# Altium PCB PCBrecepteurs.PcbDoc
Units mil, origin at the board's own origin, x right, y up, seen from the top; angles counter-clockwise.
Board outline 2635 x 2115 mil, 4 copper layers (Top Layer, Internal Plane 1, Internal Plane 2, Bottom Layer); 34 components, 27 nets, 106 pads, 0 vias.
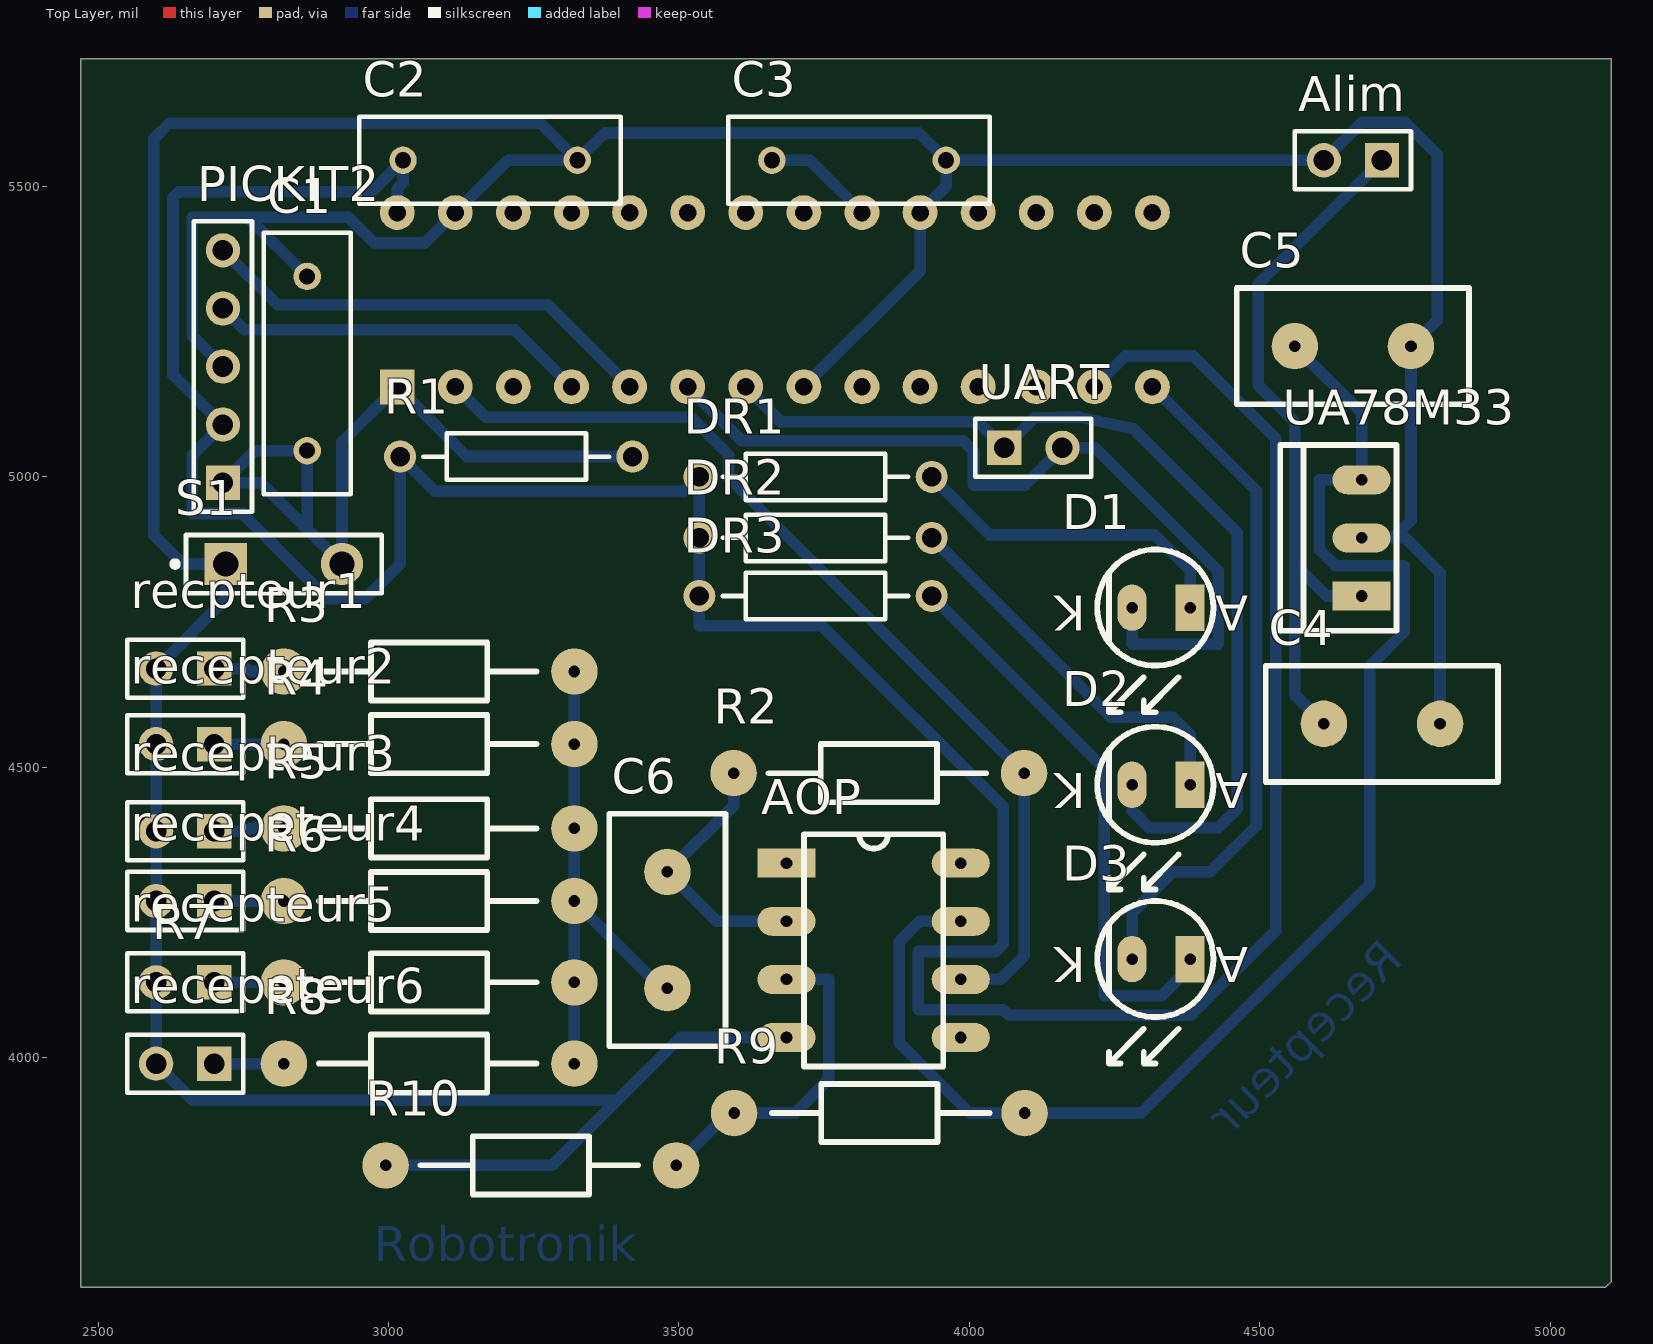
[diagram p0: Top Layer view]
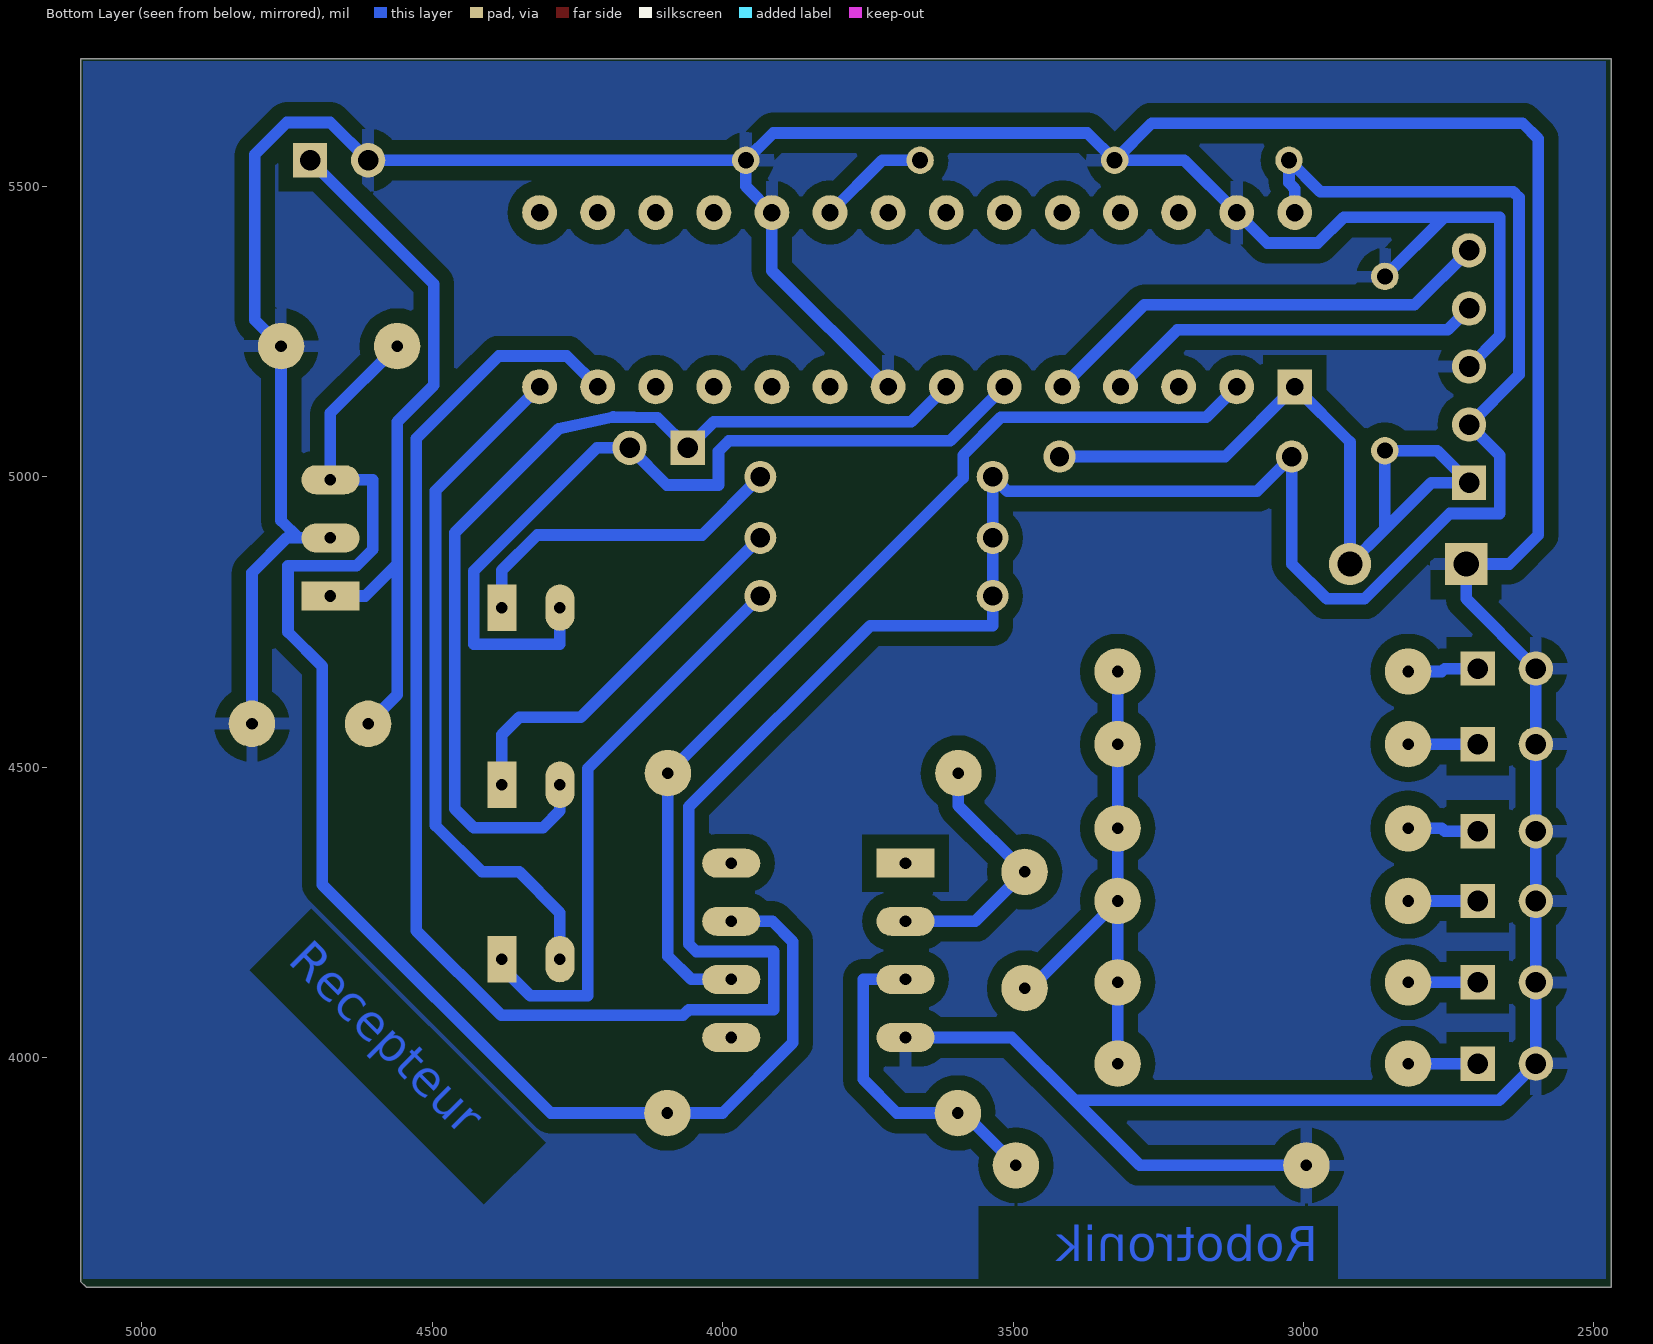
[diagram p1: Bottom Layer view, seen from below]
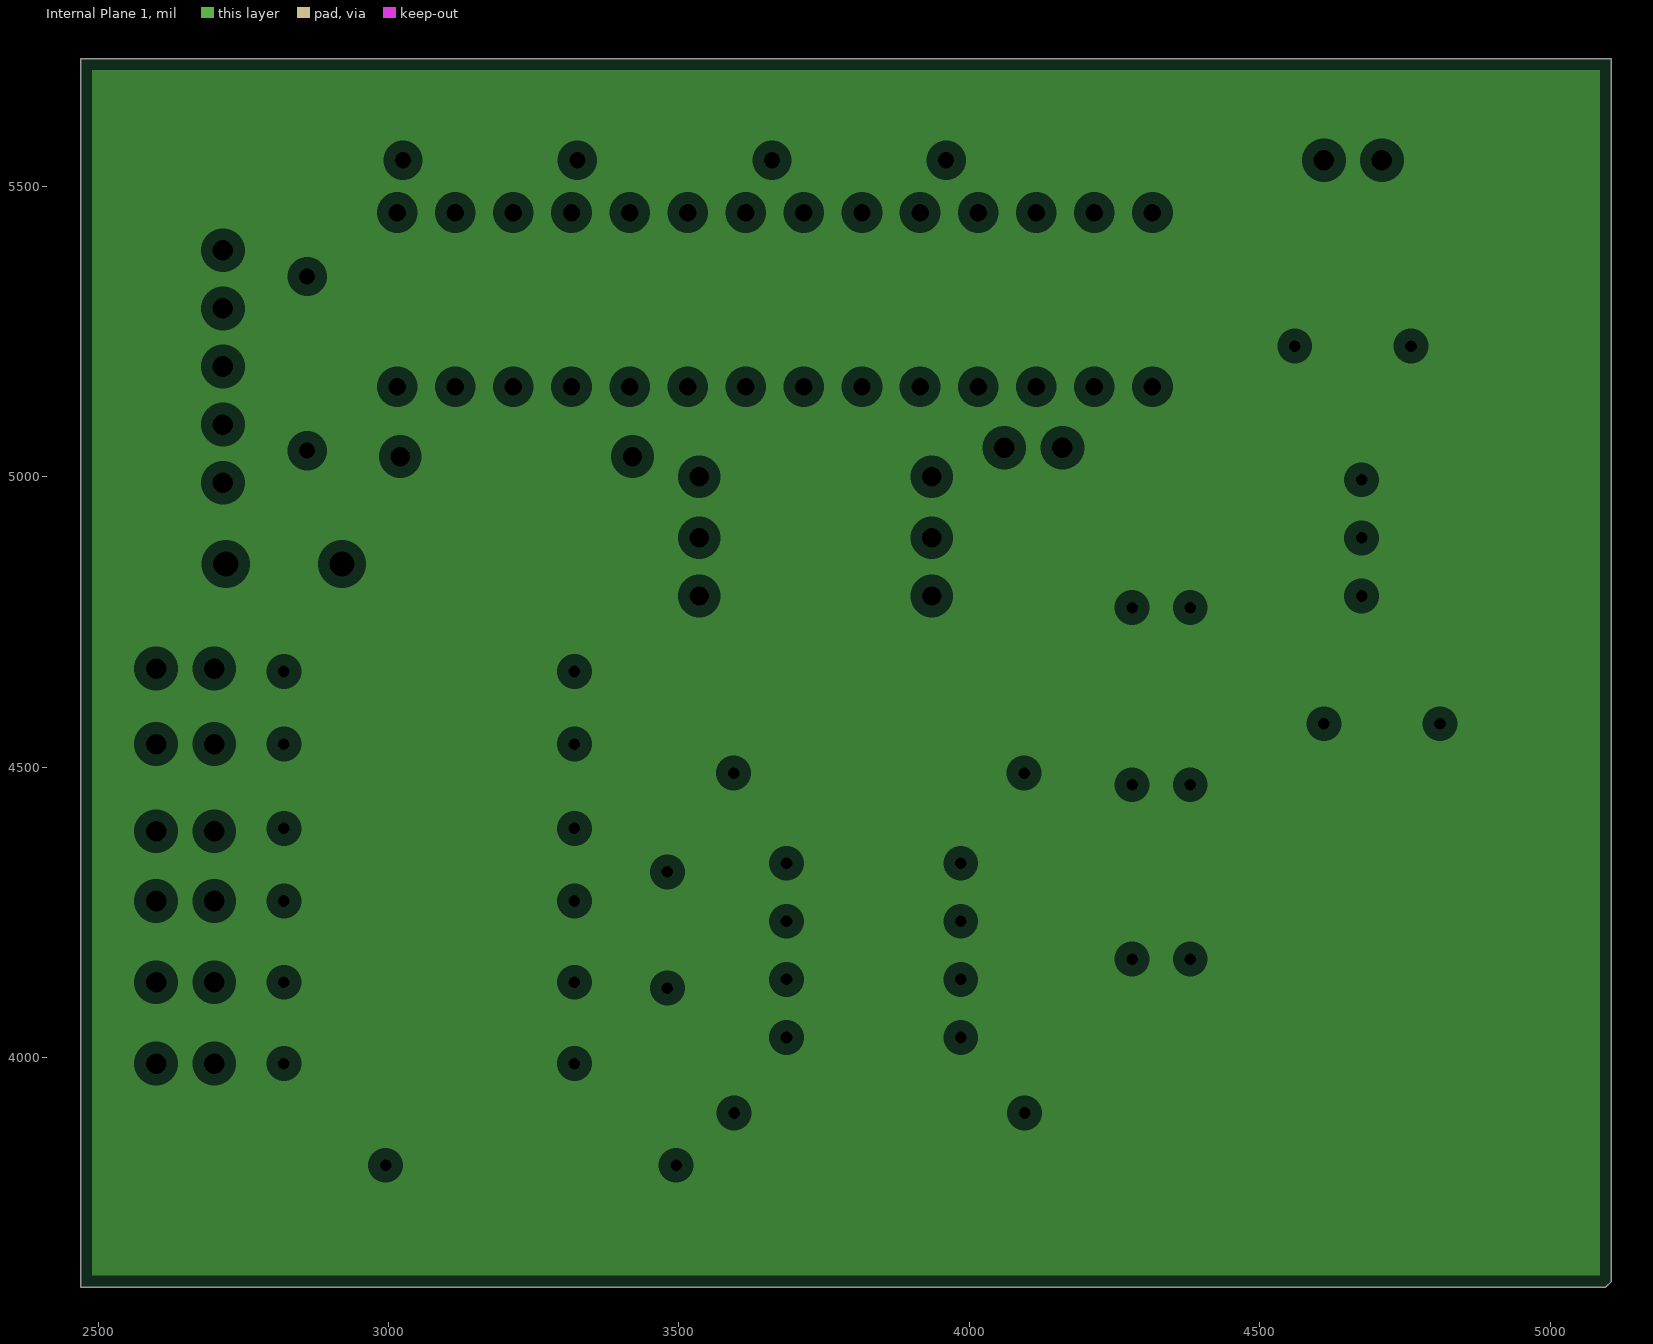
[diagram p2: Internal Plane 1, clearances drawn from the general rule]
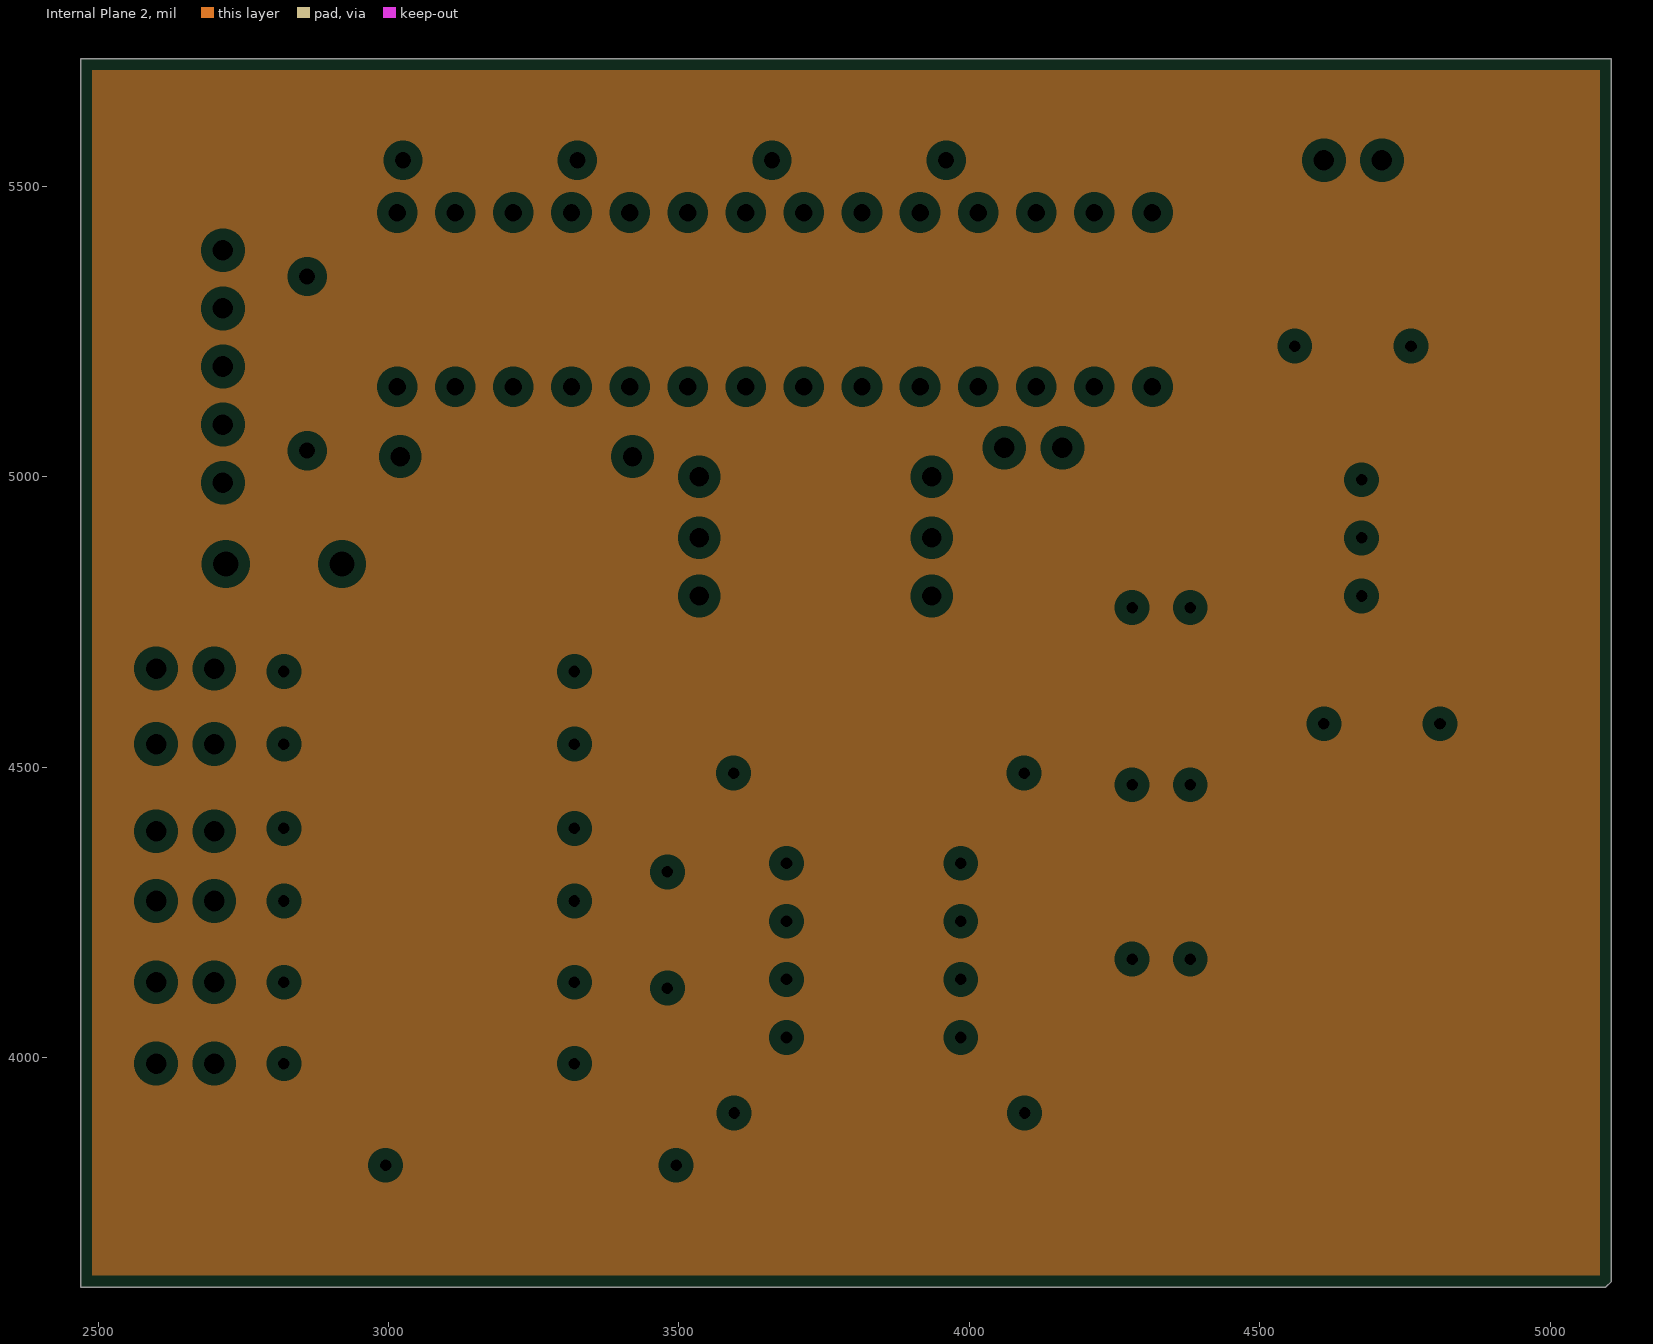
[diagram p3: Internal Plane 2, clearances drawn from the general rule]

## Layer stack, top to bottom
Top Layer: signal copper 1.4
Dielectric: dielectric 12.6, FR-4, Dk 4.8
Internal Plane 1: plane copper 1.4
Dielectric: dielectric 12.6, FR-4, Dk 4.8
Internal Plane 2: plane copper 1.4
Dielectric: dielectric 12.6, FR-4, Dk 4.8
Bottom Layer: signal copper 1.4

## Board outline
2470,5720 5105,5720 5105,3615 5095,3605 2470,3605

## Design rules (kind name [scope] priority, off if disabled: settings)
Clearance [All] p1: gap=13
FabricationTestPointUsage TestPointUsage [All] p1: valid=0 allowmultiple=FALSE
FabricationTestpoint Testpoint [All] p1: side=3 testpointundercomponent=TRUE minsize=40 maxsize=100 preferedsize=60 minholesize=0 maxholesize=40 preferedholesize=32 testpointgrid=1 allowsidetop=TRUE allowsidebottom=TRUE usegrid=TRUE gridtolerance=0.01
PlaneClearance [All] p1: clearance=20
PlaneConnect [All] p1: planeconnectstyle=Relief reliefexpansion=20 reliefentries=4 reliefconductorwidth=10 reliefairgap=10
PolygonConnect [All] p1: connectstyle=Relief reliefconductorwidth=20 reliefentries=4 polygonreliefangle="90 Angle"
RoutingLayers RoutingLayers_1 [All] p1: top layer_v5=FALSE bottom layer_v5=TRUE
RoutingVias [All] p1: holewidth=20 width=60 viastyle="Through Hole" minholewidth=20 minwidth=60 maxholewidth=20 maxwidth=60
SilkscreenOverComponentPads [All] p1: minsilkscreentomaskgap=10
SolderMaskExpansion [All] p1: expansion=4
Width Width_1 [All] p1: maxlimit=20 minlimit=20 preferedwidth=20
22 further rules are at their usual default settings.

## Components (designator, comment, footprint, x,y, rotation, side; value= is the part's Value field where it differs from the comment)
Alim "Header 2" HDR1X2 4710,5545 r180 top
AOP "TL081CN" DIP8 3685,4335 r0 top
C1 "Cap" RAD-0.3 2860,5195 r270 top
C2 "Cap" RAD-0.3 3175,5545 r180 top
C3 "Cap" RAD-0.3 3810,5545 r180 top
C4 "Cap2" CAPA2 4810,4575 r180 top
C5 "Cap2" CAPA2 4760,5225 r180 top
C6 "Cap2" CAPA2 3480,4120 r90 top
D1 "Led Verte" LED 4380,4775 r180 top
D2 "Led Orange" LED 4380,4470 r180 top
D3 "Led Rouge" LED 4380,4170 r180 top
DR1 "Res2" AXIAL-0.4 3735,5000 r180 top
DR2 "Res2" AXIAL-0.4 3735,4895 r180 top
DR3 "Res2" AXIAL-0.4 3735,4795 r180 top
PICKIT2 "Header 5H" HDR1X5 2715,4990 r90 top
R1 "Res2" AXIAL-0.4 3220,5035 r180 top
R2 "Res2" res5_1/4W 3594,4490 r0 top
R3 "Res2" res5_1/4W 2820,4665 r0 top
R4 "Res2" res5_1/4W 2820,4540 r0 top
R5 "Res2" res5_1/4W 2820,4395 r0 top
R6 "Res2" res5_1/4W 2820,4270 r0 top
R7 "Res2" res5_1/4W 2820,4130 r0 top
R8 "Res2" res5_1/4W 2820,3990 r0 top
R9 "Res2" res5_1/4W 4095,3905 r180 top
R10 "Res2" res5_1/4W 2995,3815 r0 top
recepeteur4 "Header 2" HDR1X2 2700,4270 r180 top
recepeteur6 "Header 2" HDR1X2 2700,3990 r180 top
recepteur2 "Header 2" HDR1X2 2700,4540 r180 top
recepteur3 "Header 2" HDR1X2 2700,4390 r180 top
recepteur5 "Header 2" HDR1X2 2700,4130 r180 top
recpteur1 "Header 2" HDR1X2 2700,4670 r180 top
S1 "SW-SPST" SPST-2 2820,4850 r0 top
UA78M33 "LM7805CT" TO220 4675,4795 r90 top
UART "Header 2" HDR1X2 4060,5050 r0 top

## Footprints (in the part's own frame and the unit in brackets; to place one, negate y for a bottom-side part, rotate by r counter-clockwise, add the part's x,y. Pads: shape width x height; smd on the part's side, far side on the other; paste and mask are expansions set on the pad)
AXIAL-0.4 [mm] "Axial Device, Thru-Hole; 2 Leads; 0.4 in Pin Spacing"
  round 1.4 hole 0.85: 1(-5.08,0) 2(5.08,0)
  silkscreen extent -4.06,-1.02 4.06,1.02
CAPA2 [mil]
  round 80 hole 20: 1(0,0) 2(200,0)
  silkscreen extent -100,-100 300,100
DIP8 [mil]
  rect 100x50 hole 20: 1(0,0)
  oval 100x50 hole 20: 2(0,-100) 3(0,-200) 4(0,-300) 5(300,-300) 6(300,-200) 7(300,-100) 8(300,0)
  silkscreen extent 30,-350 270,50
HDR1X2 [mm] "Connector; Header; 2 Position"
  rect 1.5x1.5 hole 0.9: 1(0,0)
  round 1.5 hole 0.9: 2(2.54,0)
  silkscreen extent -1.27,-1.27 3.81,1.27
HDR1X5 [mm] "Connector; Header; 5 Position"
  rect 1.5x1.5 hole 0.9: 1(0,0)
  round 1.5 hole 0.9: 2(2.54,0) 3(5.08,0) 4(7.62,0) 5(10.16,0)
  silkscreen extent -1.27,-1.27 11.43,1.27
LED [mil]
  rect 50x80 hole 20: 1(0,0)
  oval 50x80 hole 20: 2(100,0)
  silkscreen extent -40,-100 160,180
RAD-0.3 [mm] "Radial Cap, Thru-Hole; 2 Leads; 0.3 in Pin Spacing"
  round 1.2 hole 0.7: 1(-3.81,0) 2(3.81,0)
  silkscreen extent -5.71,-1.91 5.71,1.91
res5_1/4W [mil]
  round 80 hole 20: 1(0,0) 2(500,0)
  silkscreen extent 60,-50 435,50
SPST-2 [mm] "Switch; 2 Leads"
  rect 1.85x1.85 hole 1.1: 1(-2.54,0)
  round 1.85 hole 1.1: 2(2.54,0)
  silkscreen extent -4.89,-1.27 4.28,1.27
TO220 [mil]
  rect 50x100 hole 20: 1(0,0)
  oval 50x100 hole 20: 2(100,0) 3(200,0)
  silkscreen extent -60,-60 260,140

## Part data
Alim recepeteur4 recepeteur6 recepteur2 recepteur3 recepteur5 recpteur1 UART: "Header, 2-Pin"
AOP: "General-Purpose J-FET Single Operational Amplifier"
C1 C2 C3 C4 C5 C6: "Capacitor"
D1 D2 D3: library part Led, "LED"
DR1 DR2 DR3 R1 R2 R3 R4 R5 R6 R7 R8 R9 R10: "Resistor"
PICKIT2: "Header, 5-Pin, Right Angle"
S1: "Single-Pole, Single-Throw Switch"
UA78M33: "Series 3-Terminal Positive Regulator"

## Free pads (board coordinates)
  round 60 hole 30: 0(3015,5455) 1(3115,5455) 2(3215,5455) 3(3315,5455) 4(3415,5455) 5(3515,5455) 6(3615,5455) 7(3715,5455) 8(3815,5455) 9(3915,5455) 10(4015,5455) 11(4115,5455) 12(4215,5455) 13(4315,5455) 14(4315,5155) 15(4215,5155) 16(4115,5155) 17(4015,5155) 18(3915,5155) 19(3815,5155) 20(3715,5155) 21(3615,5155) 22(3515,5155) 23(3415,5155) 24(3315,5155) 25(3215,5155) 26(3115,5155)
  rect 60x60 hole 30: 27(3015,5155)

## Nets (pads, with @x,y where several pads share a name; then routed paths per layer and width w, separated by ;. In a path a pad name is that pad's centre, name@x,y a point inside that pad or via, vN(x,y) a via of type N, cw(c..) or ccw(c..) an arc to the next point about the centre after c; other vN are vias at no path point)
ALIM: Alim.1 C4.2 UA78M33.1 | length 1242.8
  Bottom Layer w20: C4.2 4560,4625 4560,4850 ; UA78M33.1 4615,4795 4560,4850 ; Alim.1 4497,5332 4497,5158.01 4560,5095.01 4560,4850
DEBUG: D3.2 pad.14 | length 1185.3
  Bottom Layer w20: D3.2 4280,4250 4350,4320 4414,4320 4494,4400 4494,4976 pad.14
GND: Alim.2 AOP.4 C1.1 C2.1 C3.1 C4.1 C5.1 pad.1 pad.9 pad.20 PICKIT2.3 R10.1 recepeteur4.2 recepeteur6.2 recepteur2.2 recepteur3.2 recepteur5.2 recpteur1.2 S1.1 UA78M33.2 | length 8439.1
  Bottom Layer w20: PICKIT2.3 2662,5243 2662,5447 2758,5447 ; C1.1 2758,5447 ; R10.1 3282,3815 3394,3927 ; AOP.4 3502,4035 3394,3927 ; pad.20 3915,5355 pad.9 3960,5500 C3.1 ; UA78M33.2 4730,4895 ; C4.1 4810,4835 4750,4895 4730,4895 ; 2758,5447 2930.94,5447 2975.47,5402.47 3062.47,5402.47 pad.1 3205,5545 C2.1 ; C2.1 3372,5592 3913,5592 C3.1 ; C2.1 3261,5609 2623,5609 2596,5582 2596,4900 2646,4850 S1.1 2720,4790 recpteur1.2 recepteur2.2 recepteur3.2 recepeteur4.2 recepteur5.2 recepeteur6.2 2663,3927 3394,3927 ; C3.1 Alim.2 4675,5610 4750,5610 4805,5555 4805,5270 C5.1 4760,4925 4730,4895
NetAOP_2: AOP.2 C6.2 R2.1 | length 457.4
  Bottom Layer w20: R2.1 3594,4434 C6.2 3565,4235 AOP.2
NetAOP_3: AOP.3 R9.2 R10.2 | length 569.3
  Bottom Layer w20: R10.2 3585,3905 R9.2 3700,3905 3758,3963 3758,4135 AOP.3
NetC1_2: C1.2 pad.27 PICKIT2.1 R1.1 S1.2 | length 1364.8
  Bottom Layer w20: R1.1 3135,5035 pad.27 2920,5060 S1.2 2860,4910 ; 2860,4910 2780,4990 PICKIT2.1 2770,5045 C1.2 2860,4910
NetC3_2: C3.2 pad.8 | length 192.3
  Bottom Layer w20: C3.2 3725,5545 pad.8
NetC6_1: C6.1 R3.2 R4.2 R5.2 R6.2 R7.2 R8.2 | length 897.1
  Bottom Layer w20: R8.2 R7.2 R6.2 ; R3.2 R4.2 R5.2 R6.2 ; C6.1 3470,4120 R6.2
NetD1_1: D1.1 DR1.1 | length 575.7
  Bottom Layer w20: DR1.1 4035,4900 4319,4900 4380,4839 D1.1
NetD2_1: D2.1 DR2.1 | length 671.4
  Bottom Layer w20: DR2.1 4244,4586 4350,4586 4380,4556 D2.1
NetD3_1: D3.1 DR3.1 | length 993.4
  Bottom Layer w20: DR3.1 4232,4498 4232,4107 4331.21,4107 4380,4155.79 D3.1
PGC: pad.23 PICKIT2.5 | length 797.3
  Bottom Layer w20: PICKIT2.5 2809,5296 3274,5296 pad.23
PGD: pad.24 PICKIT2.4 | length 655.9
  Bottom Layer w20: PICKIT2.4 2752,5253 3217,5253 pad.24
R1: R3.1 recpteur1.1 | length 122.1
  Bottom Layer w20: recpteur1.1 2757,4670 2762,4665 R3.1
R2: R4.1 recepteur2.1 | length 120
  Bottom Layer w20: recepteur2.1 R4.1
R3: R5.1 recepteur3.1 | length 122.1
  Bottom Layer w20: recepteur3.1 2757,4390 2762,4395 R5.1
R4: R6.1 recepeteur4.1 | length 120
  Bottom Layer w20: recepeteur4.1 R6.1
R5: R7.1 recepteur5.1 | length 120
  Bottom Layer w20: recepteur5.1 R7.1
R6: R8.1 recepeteur6.1 | length 120
  Bottom Layer w20: recepeteur6.1 R8.1
SORTIECAPTEURS: AOP.6 pad.26 R2.2 | length 1718.1
  Bottom Layer w20: pad.26 3167.53,5102.47 3520.86,5102.47 3586,5037.33 3586,4998 R2.2 4094,4175 4054,4135 AOP.6
TOUR1: pad.5
TOUR2: pad.4
TOUR3: pad.3
UART_RX: D2.2 pad.21 UART.1 | length 1714
  Bottom Layer w20: pad.21 3675,5095 4015,5095 UART.1 4112,5102 4188,5103 4282,5083 4461,4904 4461,4429 4428,4396 4309,4396 4280,4425 D2.2
UART_TX: D1.2 pad.22 UART.2 | length 1468.3
  Bottom Layer w20: pad.22 3608,5062 3989,5062 4007,5044 4007,4986 4096,4986 UART.2 4216,5050 4428,4838 4428,4712 4280,4712 D1.2
VCC: AOP.7 C5.2 R9.1 UA78M33.3 | length 2519.1
  Bottom Layer w20: AOP.7 3914,4235 3879,4200 3879,4026 4000,3905 R9.1 4296,3905 4689,4298 4689,4674 4748,4733 4748,4847 4630,4847 4602,4875 4602,4995 UA78M33.3 4675,5110 C5.2
VDD: C2.2 DR1.2 DR2.2 DR3.2 pad.0 pad.15 PICKIT2.2 R1.2 | length 5611.5
  Bottom Layer w20: pad.0 3015,5496 3025,5506 C2.2 2971,5491 2639,5491 2629,5481 2629,5176 PICKIT2.2 2662.47,5037.47 2662.47,4937 2748,4937 2895,4790 2960,4790 3020,4850 R1.2 3080,4975 3510,4975 DR1.2 DR2.2 DR3.2 3535,4744 3746,4744 4058,4432 4058,4196 4045,4183 3912,4183 3912,4083 4058,4083 4068,4073 4381,4073 4527,4219 4527,5066 4385,5208 4268,5208 pad.15
pads on no net: AOP.1 AOP.5 AOP.8

## Polygon pours and split planes (outlines as drawn)
GND on Bottom Layer "Plan de masse" (solid, remove dead copper, pour order 3): 2480,5715 5100,5715 5100,3620 2480,3620
no net on Internal Plane 1 (split plane): 5084.9,3625.1 2490.1,3625.1 2490.1,5699.9 5084.9,5699.9
no net on Internal Plane 2 (split plane): 5084.9,3625.1 2490.1,3625.1 2490.1,5699.9 5084.9,5699.9

## Other copper
Bottom Layer:
  text "Recepteur" at 4750,4165 h60 r45
  text "Robotronik" at 2975,3650 h60

## Silkscreen, mask and mechanical layers (free items; w line width, h text height)
Drill Drawing:
  text ".LEGEND" at 6622.01,3455 h60
  text "Drill Drawing." at 6622.01,3335 h60

## Text inside footprints (layer, text, board x,y; h text height)
D1: Top Overlay "A" at 4480,4795 h60 r180; Top Overlay "K" at 4200,4795 h60 r180
D2: Top Overlay "A" at 4480,4490 h60 r180; Top Overlay "K" at 4200,4490 h60 r180
D3: Top Overlay "A" at 4480,4190 h60 r180; Top Overlay "K" at 4200,4190 h60 r180